# Altium PCB PCB1.PcbDoc
Units mm, origin at the board's own origin, x right, y up, seen from the top; angles counter-clockwise.
Board outline 140.84 x 91.44 mm, 2 copper layers (Top Layer, Bottom Layer); 82 components, 83 nets, 301 pads, 21 vias.
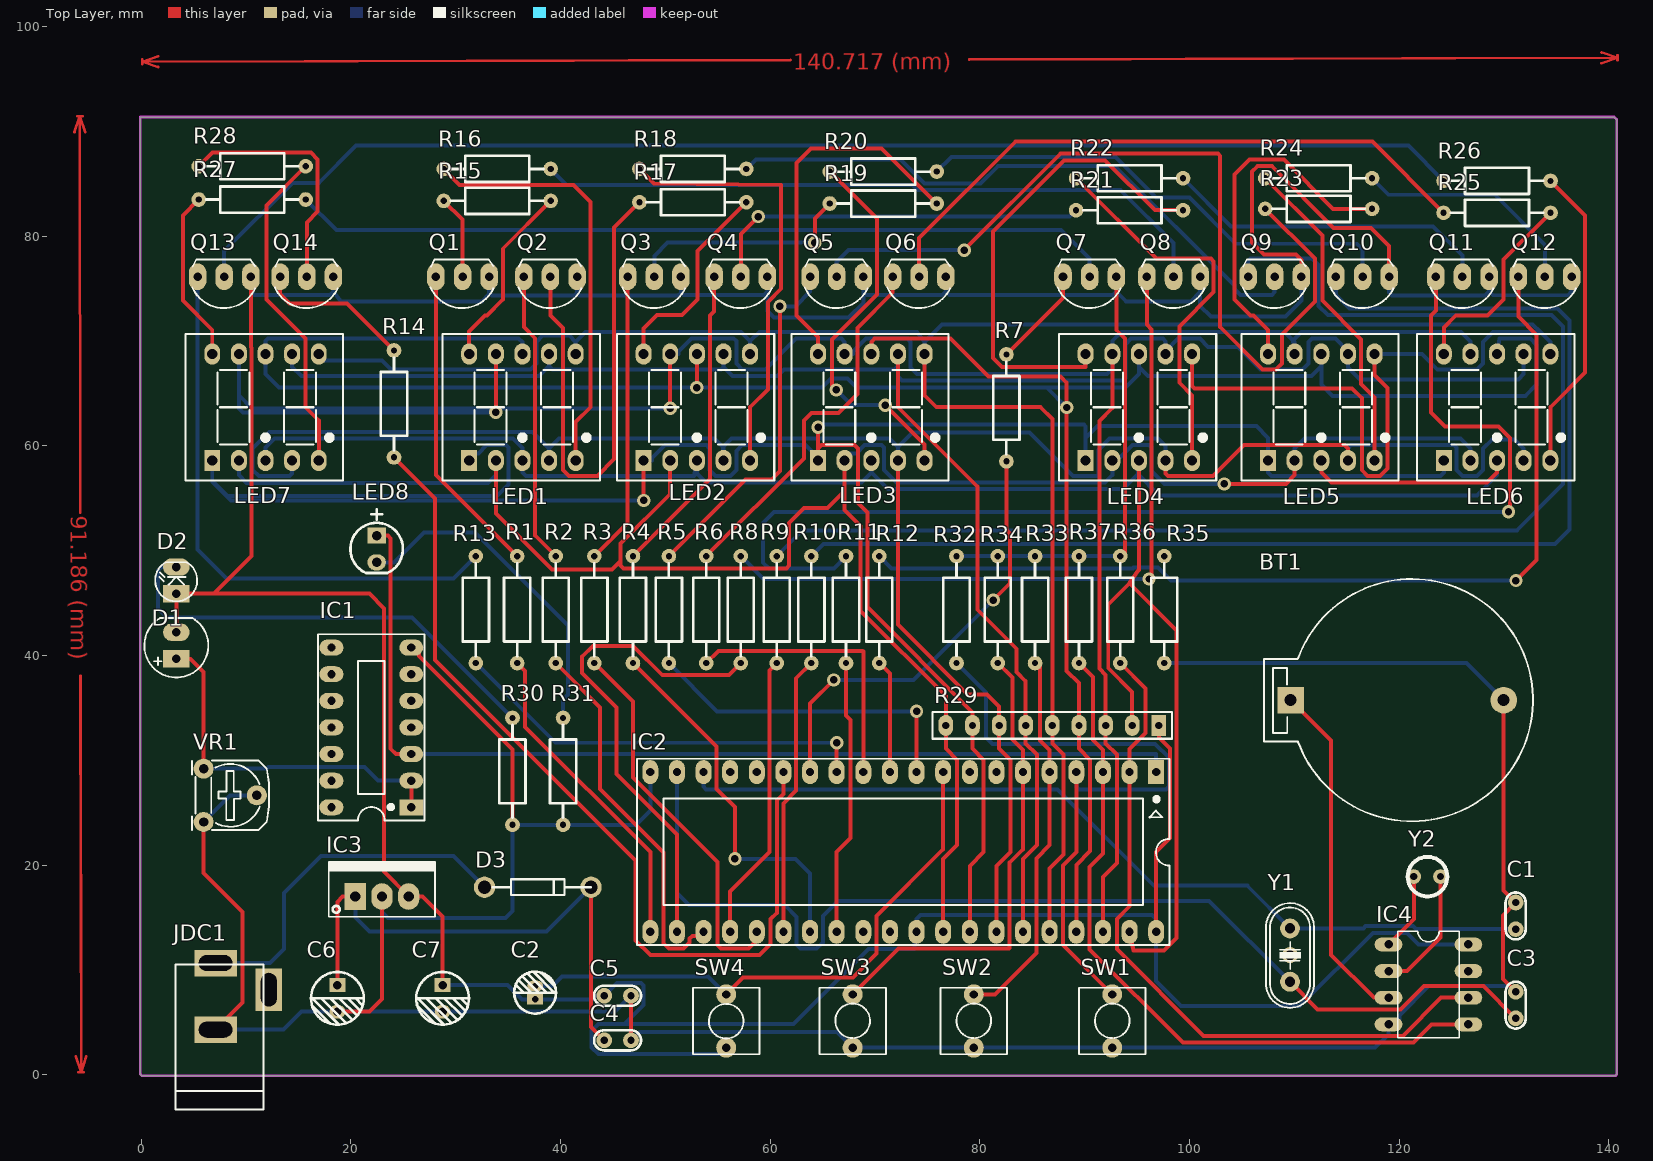
[diagram p0: Top Layer view]
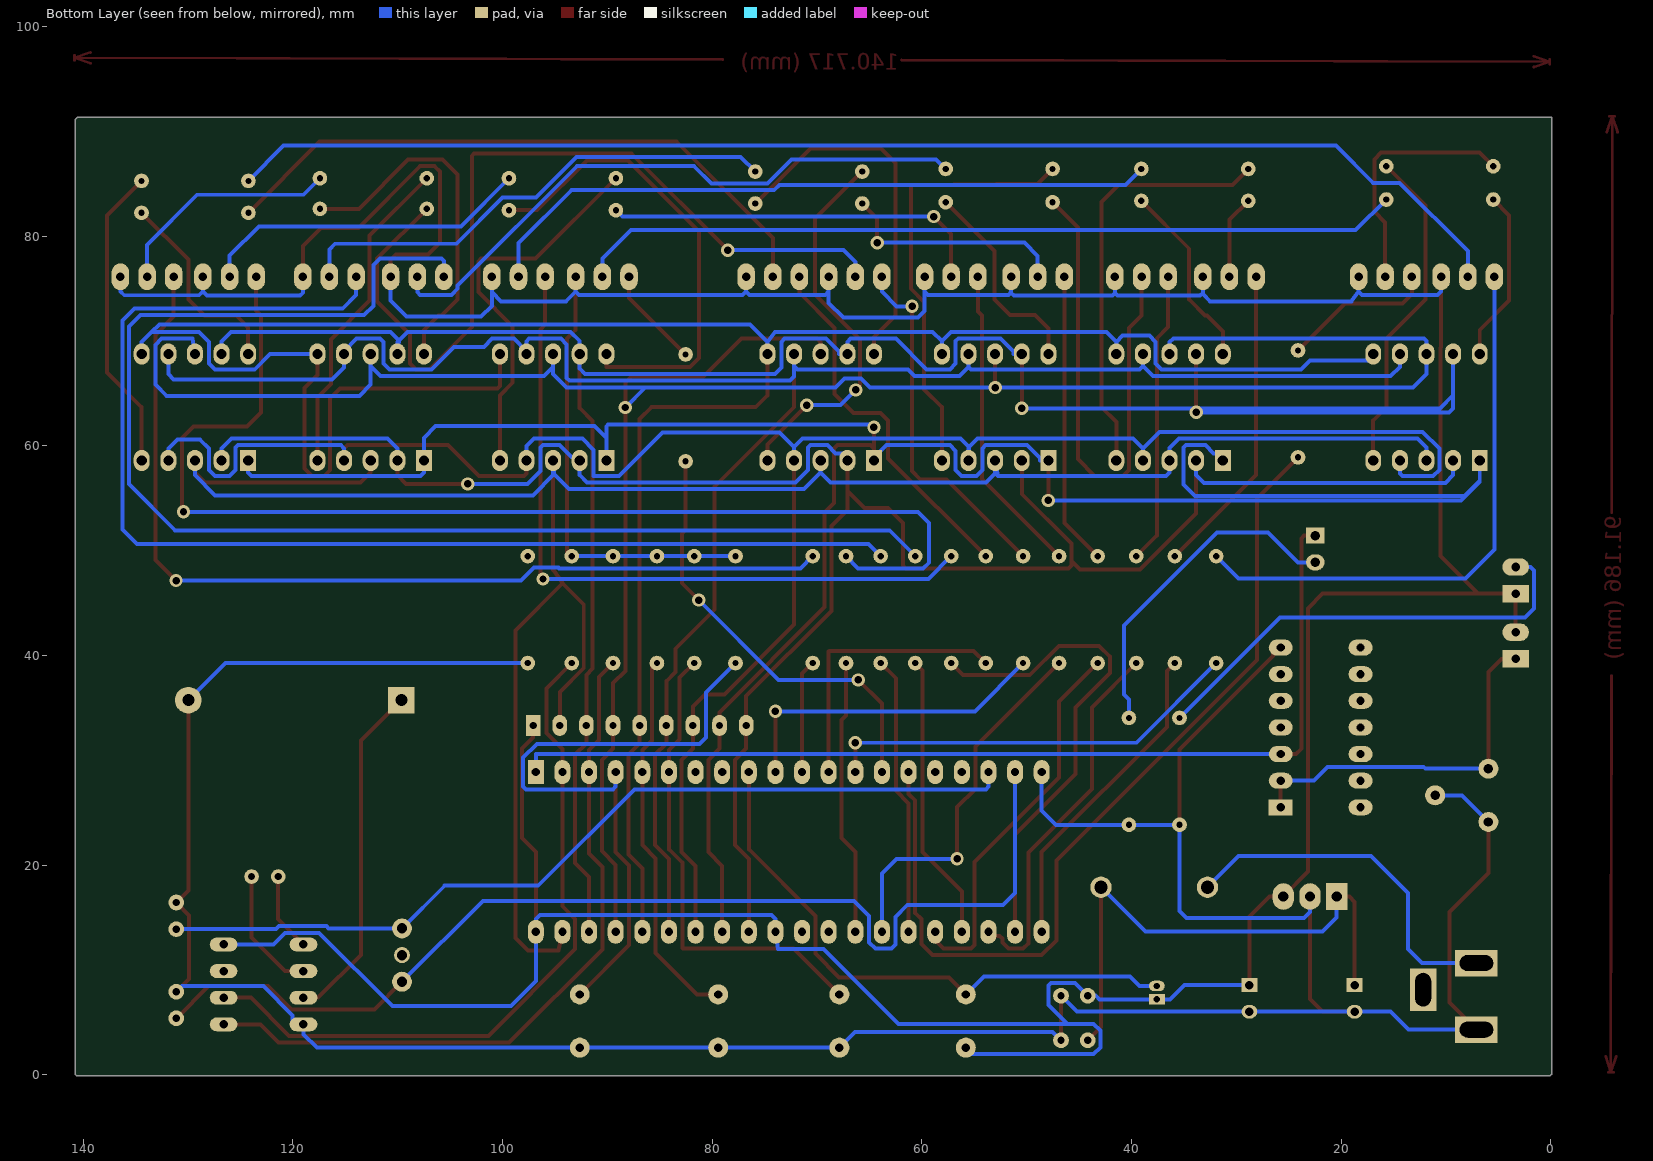
[diagram p1: Bottom Layer view, seen from below]
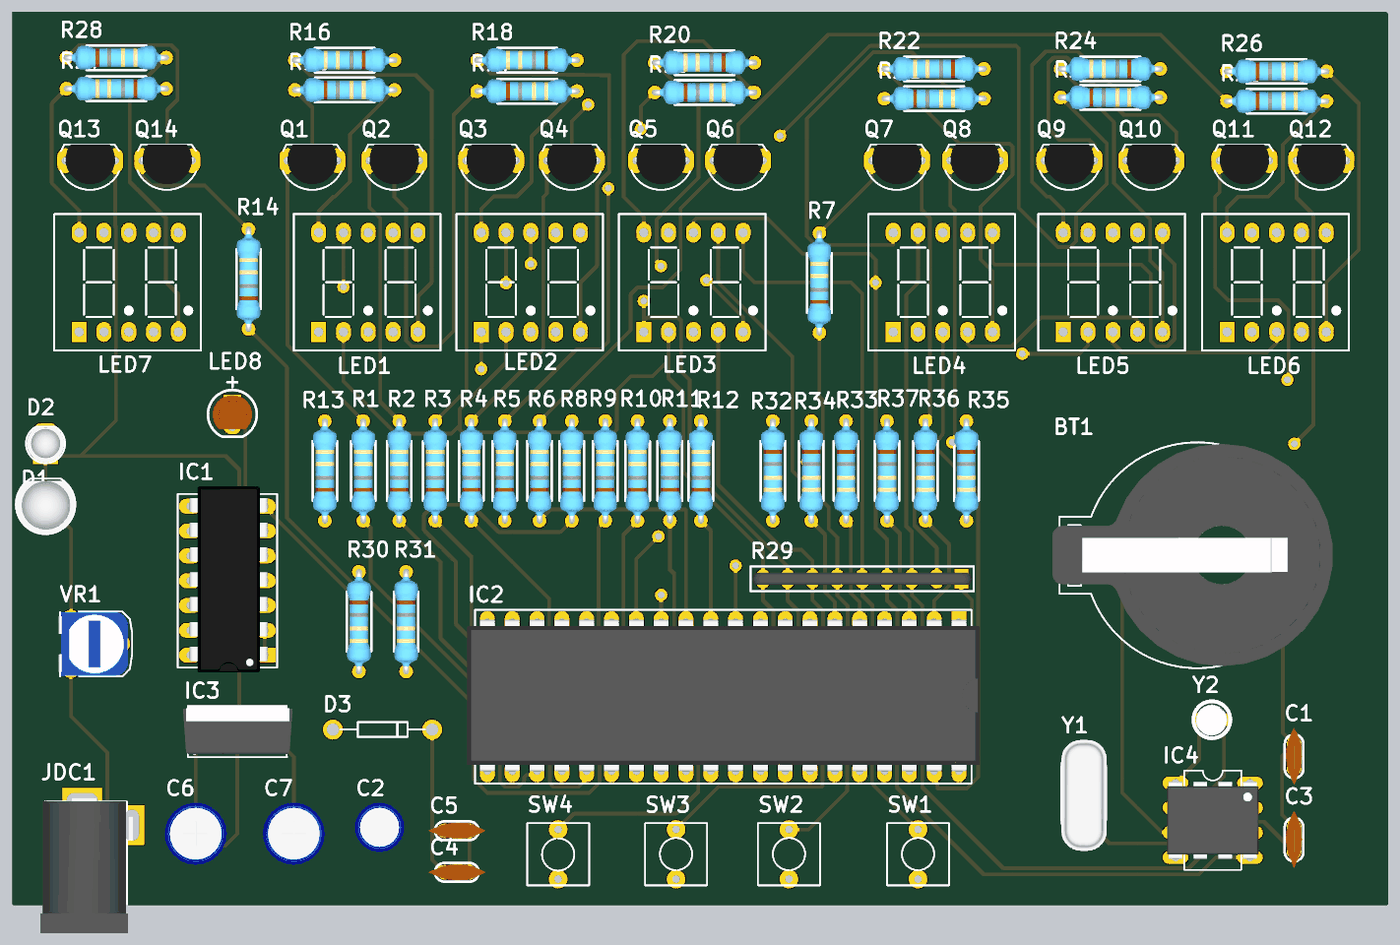
[diagram p2: 3D render of the assembled board from above, using the file's embedded part models]

## Layer stack, top to bottom
Top Solder: solder mask 0.0102, Solder Resist, Dk 3.5
Top Layer: signal copper 0.0356
Dielectric 1: dielectric 0.32, FR-4, Dk 4.8
Bottom Layer: signal copper 0.0356
Bottom Solder: solder mask 0.0102, Solder Resist, Dk 3.5

## Board outline
-0.064,0.064 0.064,-0.064 140.653,-0.064 140.779,0.064 140.779,91.123 140.525,91.376 -0.064,91.376

## Design rules (kind name [scope] priority, off if disabled: settings)
Clearance [All] p1: gap=0.254 ignorepadtopadclearanceinfootprint=FALSE
PolygonConnect [All] p1: connectstyle=Relief reliefconductorwidth=0.254 reliefentries=4 polygonreliefangle="90 Angle" airgapwidth=0.254
RoutingVias [All] p1: holewidth=0.711 width=1.27 viastyle="Through Hole" minholewidth=0.711 minwidth=1.27 maxholewidth=0.711 maxwidth=1.27
SolderMaskExpansion [All] p1: expansion=0.102 istentingtop=FALSE
Width [All] p1: maxlimit=0.508 minlimit=0.254 preferedwidth=0.381
30 further rules are at their usual default settings.

## Components (designator, comment, footprint, x,y, rotation, side; value= is the part's Value field where it differs from the comment)
BT1 "PIN 3V" PIN3V 109.664,35.75 r0 top
C1 "22pF" "tu gom" 131.127,15.176 r90 top
C2 "10uF" "tu hoa 4mm" 37.592,7.851 r90 top
C3 "22pF" "tu gom" 131.127,6.667 r90 top
C4 "104" "tu gom" 45.466,3.302 r0 top
C5 "104" "tu gom" 45.466,7.556 r0 top
C6 "100uF" "tu hoa 5mm" 18.732,7.302 r270 top
C7 "100uF" "tu hoa 5mm" 28.765,7.302 r270 top
D1 "Photo Diode" LED-5-Green 3.365,39.688 r90 top
D2 "Phat" LED-3 3.365,45.91 r90 top value="LED 3 ly Single Colour"
D3 "1N4007" "Diode 1N4007" 37.846,17.907 r0 top
IC1 "MC14093" DIP14/W0.3 25.781,25.527 r90 top
IC2 "AT89C52" DIP40/W0.6 96.837,28.892 r180 top
IC3 "LM7805" QTO-220 20.447,17.018 r0 top
IC4 "DS1307" DIL08 122.809,8.636 r270 top
JDC1 "Jack DC5.5x2.1" DC-IN 9.652,7.493 r90 top
LED1 "Led 7 0.36 3 Số Anot ( Sáng Đỏ)" "LED 7 THANH_0.36x2" 28.765,56.731 r0 top
LED2 "Led 7 0.36 3 Số Anot ( Sáng Đỏ)" "LED 7 THANH_0.36x2" 45.402,56.731 r0 top
LED3 "Led 7 0.36 3 Số Anot ( Sáng Đỏ)" "LED 7 THANH_0.36x2" 62.039,56.731 r0 top
LED4 "Led 7 0.36 3 Số Anot ( Sáng Đỏ)" "LED 7 THANH_0.36x2" 87.566,56.731 r0 top
LED5 "Led 7 0.36 3 Số Anot ( Sáng Đỏ)" "LED 7 THANH_0.36x2" 104.965,56.731 r0 top
LED6 "Led 7 0.36 3 Số Anot ( Sáng Đỏ)" "LED 7 THANH_0.36x2" 121.73,56.731 r0 top
LED7 "Led 7 0.36 3 Số Anot ( Sáng Đỏ)" "LED 7 THANH_0.36x2" 4.255,56.731 r0 top
LED8 "" "LED 3mm Do" 22.479,50.165 r270 top
Q1 "" QTO-92 30.67,76.136 r180 top value=A1015
Q2 "" QTO-92 39.052,76.136 r180 top value=A1015
Q3 "" QTO-92 48.959,76.136 r180 top value=A1015
Q4 "" QTO-92 57.213,76.136 r180 top value=A1015
Q5 "" QTO-92 66.358,76.136 r180 top value=A1015
Q6 "" QTO-92 74.231,76.136 r180 top value=A1015
Q7 "" QTO-92 90.487,76.136 r180 top value=A1015
Q8 "" QTO-92 98.489,76.136 r180 top value=A1015
Q9 "" QTO-92 108.14,76.136 r180 top value=A1015
Q10 "" QTO-92 116.522,76.136 r180 top value=A1015
Q11 "" QTO-92 126.047,76.136 r180 top value=A1015
Q12 "" QTO-92 133.921,76.136 r180 top value=A1015
Q13 "" QTO-92 7.938,76.136 r180 top value=A1015
Q14 "" QTO-92 15.811,76.136 r180 top value=A1015
R1 "10k" "tro vach 1/4w" 35.877,44.386 r270 top
R2 "10k" "tro vach 1/4w" 39.56,44.386 r270 top
R3 "10k" "tro vach 1/4w" 43.243,44.386 r270 top
R4 "10k" "tro vach 1/4w" 46.926,44.386 r270 top
R5 "10k" "tro vach 1/4w" 50.355,44.386 r270 top
R6 "10k" "tro vach 1/4w" 53.911,44.386 r270 top
R7 "10k" "tro vach 1/4w" 82.55,63.627 r270 top
R8 "10k" "tro vach 1/4w" 57.213,44.386 r270 top
R9 "10k" "tro vach 1/4w" 60.642,44.386 r270 top
R10 "10k" "tro vach 1/4w" 63.944,44.386 r270 top
R11 "10k" "tro vach 1/4w" 67.246,44.386 r270 top
R12 "10k" "tro vach 1/4w" 70.421,44.386 r270 top
R13 "10k" "tro vach 1/4w" 31.941,44.386 r270 top
R14 "10k" "tro vach 1/4w" 24.13,64.008 r270 top
R15 "10k" "tro vach 1/4w" 33.972,83.376 r180 top
R16 "10k" "tro vach 1/4w" 33.972,86.423 r0 top
R17 "10k" "tro vach 1/4w" 52.642,83.248 r180 top
R18 "10k" "tro vach 1/4w" 52.642,86.423 r0 top
R19 "10k" "tro vach 1/4w" 70.802,83.121 r180 top
R20 "10k" "tro vach 1/4w" 70.802,86.169 r0 top
R21 "10k" "tro vach 1/4w" 94.297,82.486 r180 top
R22 "10k" "tro vach 1/4w" 94.297,85.534 r0 top
R23 "10k" "tro vach 1/4w" 112.331,82.614 r180 top
R24 "10k" "tro vach 1/4w" 112.331,85.534 r0 top
R25 "10k" "tro vach 1/4w" 129.35,82.233 r180 top
R26 "10k" "tro vach 1/4w" 129.35,85.281 r180 top
R27 "10k" "tro vach 1/4w" 10.604,83.502 r0 top
R28 "10k" "tro vach 1/4w" 10.604,86.677 r180 top
R29 "330" "tro bang a9" 86.931,33.21 r180 top
R30 "220" "tro vach 1/4w" 35.433,28.956 r90 top
R31 "1k" "tro vach 1/4w" 40.259,28.956 r90 top
R32 "10k" "tro vach 1/4w" 77.787,44.386 r90 top
R33 "10k" "tro vach 1/4w" 85.281,44.386 r90 top
R34 "10k" "tro vach 1/4w" 81.724,44.386 r90 top
R35 "4.7k" "tro vach 1/4w" 97.599,44.386 r90 top
R36 "4.7k" "tro vach 1/4w" 93.408,44.386 r90 top
R37 "4.7k" "tro vach 1/4w" 89.471,44.386 r90 top
SW1 "" SW2 92.647,7.683 r270 top
SW2 "" SW2 79.438,7.683 r270 top
SW3 "" SW2 67.882,7.683 r270 top
SW4 "" SW2 55.816,2.603 r90 top
VR1 "100K" "BIEN TRO TAM GIAC" 5.969,29.21 r270 top
Y1 "12Mhz" "THACH ANH CAM" 109.601,11.43 r90 top
Y2 "32768Hz" "Thach Anh 32.768kHz" 121.412,18.923 r270 top

## Footprints (in the part's own frame and the unit in brackets; to place one, negate y for a bottom-side part, rotate by r counter-clockwise, add the part's x,y. Pads: shape width x height; smd on the part's side, far side on the other; paste and mask are expansions set on the pad)
"BIEN TRO TAM GIAC" [mil] "Resistor Variable"
  round 75 hole 35: 1(0,0) 2(100,200) 3(200,0)
  silkscreen extent -31,-44 231,246, body extent -28,-50 228,228, height 279
DC-IN [mm] "Jac DC input"
  rect 2.54x4.064 hole 1.5 slot 3.2 at 90 deg: 1(3.175,2.54) 2(-3.175,2.54)
  rect 4.064x2.54 hole 1.5 slot 3.2 at 0 deg: 3(0.635,-2.54)
  silkscreen extent -10.79,-2.03 3.05,6.35, body extent -10.42,-2.67 3.4,6.84, height 11.02
DIL08 [mil]
  oval 52x104 hole 32: 1(-150,-150) 2(-50,-150) 3(50,-150) 4(150,-150) 5(150,150) 6(50,150) 7(-50,150) 8(-150,150)
  silkscreen extent -200,-115 200,115, body extent -155,-185 155,185, height 180
"Diode 1N4007" [mil] "Diode 2A"
  round 80 hole 50: 1(-200,0) 2(200,0)
  silkscreen extent -170,-30 200,30
DIP14/W0.3 [mil] "14PIN, W 300mil, Pin to pin 100mil"
  rect 60x90 hole 31: 1(0,0)
  oval 60x90 hole 31: 2(100,0) 3(200,0) 4(300,0) 5(400,0) 6(500,0) 7(600,0) 8(600,300) 9(500,300) 10(400,300) 11(300,300) 12(200,300) 13(100,300) 14(0,300)
  silkscreen extent -50,-50 650,350, body extent -70,-12 680,302, height 145
DIP40/W0.6 [mil] "40 PIN, W 600mil, Pin to pin 100mil"
  rect 60x90 hole 31: 1(0,0)
  oval 60x90 hole 31: 2(100,0) 3(200,0) 4(300,0) 5(400,0) 6(500,0) 7(600,0) 8(700,0) 9(800,0) 10(900,0) 11(1000,0) 12(1100,0) 13(1200,0) 14(1300,0) 15(1400,0) 16(1500,0) 17(1600,0) 18(1700,0) 19(1800,0) 20(1900,0) 21(1900,600) 22(1800,600) 23(1700,600) 24(1600,600) 25(1500,600) 26(1400,600) 27(1300,600) 28(1200,600) 29(1100,600) 30(1000,600) 31(900,600) 32(800,600) 33(700,600) 34(600,600) 35(500,600) 36(400,600) 37(300,600) 38(200,600) 39(100,600) 40(0,600)
  silkscreen extent -50,-50 1950,650, body extent -82,-10 1982,600, height 224
"LED 3mm Do" [mil] "Footprintf LED phi 3"
  rect 60x70 hole 35: 1(-50,0)
  oval 60x70 hole 35: 2(50,0)
  silkscreen extent -150,-98 90,98, body extent -77,-78 60,78, height 205
"LED 7 THANH_0.36x2" [mil]
  rect 60x80 hole 38: 1(100,74)
  oval 60x80 hole 38: 2(200,74) 3(300,74) 4(400,74) 5(500,74) 6(500,474) 7(400,474) 8(300,474) 9(200,474) 10(100,474)
  silkscreen extent 0,-1 591,549
LED-3 [mil] "LED 2 PIN, 3ly Only colour"
  rect 65x100 hole 32: 1(0,0)
  oval 65x100 hole 32: 2(100,0)
  silkscreen extent -29,-78 118,79, body extent -25,-75 113,75, height 217
LED-5-Green [mil] "LED 2 PIN, 5 ly , Only colour,pin to pin 100mil"
  rect 65x100 hole 32: 1(0,0)
  oval 65x100 hole 32: 2(100,0)
  silkscreen extent -70,-120 154,120, body extent -69,-120 145,117, height 339
PIN3V [mil] "Socket PIN 3V"
  rect 100x100 hole 45: 1(0,0)
  round 100 hole 45: 2(800,0)
  silkscreen extent -100,-455 910,455, body extent -128,-447 1002,449, height 278
QTO-92 [mil] "TO-92"
  oval 66x100 hole 32: 1(-100,0) 2(0,0) 3(100,0)
  silkscreen extent -117,-65 120,118, body extent -109,-66 109,95, height 245
QTO-220 [mil] "TO-220 - 1-2-3"
  rect 80x100 hole 39: 1(0,0)
  oval 80x100 hole 39: 2(100,0) 3(200,0)
  silkscreen extent -100,-76 300,130, body extent -119,-64 322,121, height 755
SW2 [mil] "SW button 2pin, 250x 250 mil"
  round 75 hole 31: 1(0,0) 2(200,0)
  silkscreen extent -25,-125 225,125
"Thach Anh 32.768kHz" [mm]
  round 1.4 hole 0.7: 1(0,0) 2(0,2.54)
  silkscreen extent -1.88,-0.58 1.89,3.19, body extent -1.55,-0.46 1.65,3, height 8.27
"THACH ANH CAM" [mm] "Footpin for Crystal 2 pin"
  round 1.524 hole 1: 0(0,0)
  round 1.905 hole 1: 1(-2.54,0) 2(2.54,0)
  silkscreen extent -5.03,-2.29 4.96,2.29, body extent -5.93,-2.36 5.42,2.29, height 3.5
"tro bang a9" [mm]
  rect 1.4x2 hole 0.7: 1(-10.16,-0.127)
  oval 1.4x2 hole 0.7: 2(-7.62,-0.127) 3(-5.08,-0.127) 4(-2.54,-0.127) 5(0,-0.127) 6(2.54,-0.127) 7(5.08,-0.127) 8(7.62,-0.127) 9(10.16,-0.127)
  silkscreen extent -11.43,-1.4 11.43,1.14, body extent -11.25,-0.76 11.25,0.49, height 5.57
"tro vach 1/4w" [mm]
  round 1.4 hole 0.6: 1(-5.1,0) 2(5.1,0)
  silkscreen extent -4.39,-1.25 4.42,1.25, body extent -5.38,-1.2 5.38,1.2, height 2.41
"tu gom" [mm] "Tu gom mini"
  round 1.5 hole 0.7: 1(-1.27,0) 2(1.27,0)
  silkscreen extent -2.25,-0.97 2.22,0.97, body extent -2.92,-0.85 2.92,0.85, height 6.12
"tu hoa 4mm" [mm]
  rect 1x1.5 hole 0.6: 1(-0.635,0)
  oval 1x1.5 hole 0.6: 2(0.635,0)
  silkscreen extent -2,-2 2.01,2.01, body extent -2.47,-2.47 2.58,2.58, height 14.81
"tu hoa 5mm" [mm]
  rect 1.3x1.5 hole 0.8: 1(-1.27,0)
  oval 1.3x1.5 hole 0.8: 2(1.27,0)
  silkscreen extent -2.51,-2.51 2.51,2.51, body extent -3.12,-3.18 3.23,3.18, height 14.55

## Part data
BT1: "Battery 3VDC"
C1 C3: library part "Tu gom 22pF 50V", "Cắm", Chung_Loai=Cắm, Don_Vi=Con, Ma_Hang=MH004771, So_Chan=2, Ten_linh_Kien="Tụ gốm 22P 50V"
C2: library part "Tu Hoa 10uF 16V 4x7", "Cắm", Chung_Loai=Cắm, Don_Vi=Con, Ma_Hang=MH006855, So_Chan=2, Ten_linh_Kien="Tụ Hóa 10uF 16V"
C4 C5: library part "Tu gom 104 50V", "Cắm", Chung_Loai=Cắm, Don_Vi=Con, Ma_Hang=MH004761, So_Chan=2, Ten_linh_Kien="Tụ gốm 104 100nF 50V"
C6 C7: library part "Tu Hoa 100uF 16V 5x7", "Cắm", Chung_Loai=Cắm, Don_Vi=Con, Ma_Hang=MH001347, So_Chan=2, Ten_linh_Kien="Tụ Hóa 100uF 16V 5x7MM"
D1: "Photosensitive Diode"
D2: library part LED, "LED phat hong ngoai"
D3: library part D1A, "Diode 1A"
IC1: "Quad 2-Input NAND Schmitt Trigger"
IC2: "Cắm", Chung_Loai=Cắm, Don_Vi=Con, Ma_Hang=MH002200, Ten_linh_Kien="AT89C52-24PC DIP40"
IC3: library part LM78xx, "On ap +, from + 5 to + 24VDC"
IC4: "Real Time Clock (RTC) IC Clock/Calendar 56B IÂ²C, 2-Wire Serial 8-SOIC (0.154, 3.90mm Width)", Package="DIP-8 Maxim Integrated", Check_prices=https://www.snapeda.com/parts/DS1307/Analog+Devices/view-part/?ref=eda, MF="Analog Devices", MP=DS1307, SnapEDA_Link=https://www.snapeda.com/parts/DS1307/Analog+Devices/view-part/?ref=snap
JDC1: library part Jac_DC, "Cắm", Chung_Loai=Cắm, Don_Vi=Con, Ma_Hang=MH000923, Ten_linh_Kien="Jack DC5.5x2.1MM DC5501"
LED1 LED2 LED3 LED4 LED5 LED6 LED7: library part "LED 7 2 SO 0.36_A", "Cắm", Chung_Loai=Cắm, Don_Vi=Con, Ma_Hang=MH001046, Ten_linh_Kien="Led 7 0.36 3 Số Anot ( Sáng Đỏ)"
LED8: library part "LED 3mm Do", "Cắm", Chung_Loai=Cắm, Don_Vi=Con, Ma_Hang=MH004931, Ten_linh_Kien="LED 3MM Sáng Đỏ ( SS)"
Q1 Q2 Q3 Q4 Q5 Q6 Q7 Q8 Q9 Q10 Q11 Q12 Q13 Q14: library part A1015, "PNP 600mW, ECB"
R1 R2 R3 R4 R5 R6 R7 R8 R9 R10 R11 R12 R13 R14 R15 R16 R17 R18 R19 R20 R21 R22 R23 R24 R25 R26 R27 R28 R30 R32 R33 R34: library part "Tro Vach 1/4W 1% 10k", "Cắm", Chung_Loai=Cắm, Don_Vi=Con, Ma_Hang=MH006349, So_Chan=2, Ten_linh_Kien="Trở Vạch 1/4w 1% 10k"
R29: library part "Tro Bang A9 330R", "Cắm", Chung_Loai=Cắm, Don_Vi=Con, Ma_Hang=MH001436, So_Chan=9, Ten_linh_Kien="Trở Băng A09-331 330R 1/8w 5%"
R31: library part "Tro Vach 1/4W 5% 1k", "Cắm", Chung_Loai=Cắm, Don_Vi=Con, Ma_Hang=MH007390, So_Chan=2, Ten_linh_Kien="Trở Vạch 1/4w 5% 1k"
R35 R36 R37: library part "Tro Vach 1/4W 1% 4.7k", "Cắm", Chung_Loai=Cắm, Don_Vi=Con, Ma_Hang=MH006350, So_Chan=2, Ten_linh_Kien="Trở Vạch 1/4w 1% 4.7k"
SW1 SW2 SW3 SW4: library part "Nut Nhan 2 Chan ( Dip )", "Cắm", Chung_Loai=Cắm, Don_Vi=Con, Ma_Hang=MH001959, Ten_linh_Kien="Nút Nhấn 2 Chân 6x6x5MM DIP"
VR1: library part "Bien tro tam giac 1K", "Cắm", Chung_Loai=Cắm, Don_Vi=Con, Ma_Hang=MH003709, Ten_linh_Kien="Biến Trở Tam Giác 102-1K RM065"
Y1 Y2: library part "Thach Anh 8Mhz DIP", "Cắm", Chung_Loai=Cắm, Don_Vi=Con

## Via types
v1: diameter 1.27, hole 0.711, Top Layer to Bottom Layer, 21 vias

## Nets (pads, with @x,y where several pads share a name; then routed paths per layer and width w, separated by ;. In a path a pad name is that pad's centre, name@x,y a point inside that pad or via, vN(x,y) a via of type N, cw(c..) or ccw(c..) an arc to the next point about the centre after c; other vN are vias at no path point)
0.0: IC2.39 LED1.3 LED2.3 LED3.3 LED4.3 LED5.3 LED6.3 LED7.3 R29.2 | length 222.9
  Top Layer w0.381: IC2.39 94.678,11.874 97.599,11.874 98.793,13.068 98.793,42.38 94.272,46.901 ; R29.2 94.551,36.525 92.264,38.812 92.264,44.893 94.272,46.901 ; LED4.3 95.186,48.184 94.272,46.901 ; LED5.3 112.585,57.468 113.538,56.515 128.397,56.515 129.35,57.468 LED6.3
  Bottom Layer w0.381: LED7.3 11.874,59.83 12.751,60.706 35.496,60.706 36.386,59.817 LED1.3 36.386,57.468 36.716,57.137 52.768,57.137 ; LED3.3 69.659,57.468 ; LED6.3 129.35,57.213 127.43,55.294 97.106,55.294 95.098,57.302 ; 52.768,57.137 LED2.3 53.023,57.391 ; 52.768,57.137 53.023,57.391 ; 53.023,57.391 53.899,56.515 68.707,56.515 69.659,57.468 ; 69.659,57.468 71.247,55.88 93.675,55.88 95.098,57.302 ; 95.098,57.302 95.186,57.391 LED4.3 95.098,57.302
0.1: IC2.38 LED1.9 LED2.9 LED3.9 LED4.9 LED5.9 LED6.9 LED7.9 R29.3 | length 232.8
  Top Layer w0.381: v1(33.846,63.208) LED1.9 ; v1(50.482,63.589) LED2.9 ; IC2.38 91.757,18.885 93.078,20.206 93.078,30.569 92.011,31.636 R29.3 92.011,38.163 91.427,38.748 91.427,62.395 92.647,63.614 LED4.9
  Bottom Layer w0.381: LED7.9 9.335,64.834 ; v1(33.846,63.208) 9.716,63.208 9.335,63.589 9.335,64.834 ; v1(50.482,63.589) 10.579,63.589 9.335,64.834 ; LED2.9 51.27,68.77 51.27,68.999 52.502,70.231 56.54,70.231 56.782,69.99 56.782,67.869 57.34,67.31 59.576,67.31 62.497,70.231 66.802,70.231 67.12,69.913 LED3.9 67.907,68.77 67.907,68.999 69.139,70.231 73.101,70.231 73.419,69.913 73.419,67.475 74.028,66.865 92.138,66.865 92.647,67.373 LED4.9 92.647,69.99 93.523,70.866 109.093,70.866 109.893,70.066 ; LED6.9 126.809,69.964 125.908,70.866 110.693,70.866 109.893,70.066 ; 109.893,70.066 110.045,69.913 LED5.9 109.893,70.066
0.2: IC2.37 LED1.8 LED2.8 LED3.8 LED4.8 LED5.8 LED6.8 LED7.8 R29.4 | length 249
  Top Layer w0.381: v1(53.023,65.57) LED2.8 ; LED3.8 69.659,69.913 69.99,70.244 77.203,70.244 80.835,66.611 87.719,66.611 88.303,66.027 v1(88.303,63.665) 88.303,38.544 89.471,37.376 R29.4 89.471,31.128 90.538,30.061 90.538,21.35 89.218,20.029 IC2.37
  Bottom Layer w0.381: LED1.8 36.386,69.913 36.03,70.269 12.128,70.269 11.874,70.015 LED7.8 11.874,66.865 13.17,65.57 v1(53.023,65.57) 64.96,65.57 65.811,66.421 67.4,66.421 68.25,65.57 86.398,65.57 ; v1(88.303,63.665) 86.398,65.57 ; LED4.8 95.186,67.551 ; LED5.8 112.585,67.627 ; LED6.8 129.591,70.231 132.524,70.231 133.109,69.647 133.109,65.849 132.042,64.783 113.652,64.783 112.585,65.849 112.585,67.627 ; 86.398,65.57 93.916,65.57 95.186,66.84 95.186,67.551 ; 95.186,67.551 96.063,66.675 111.633,66.675 112.585,67.627
0.3: IC2.36 LED1.6 LED2.6 LED3.6 LED4.6 LED5.6 LED6.6 LED7.6 R29.5 | length 255.8
  Top Layer w0.381: LED3.6 74.739,64.834 75.882,63.691 85.788,63.691 86.931,62.547 R29.5 86.931,31.636 87.998,30.569 87.998,21.018 86.677,19.698 IC2.36 ; LED4.6 100.266,65.722 100.495,65.494 115.506,65.494 116.446,64.554 116.446,57.696 116.992,57.15 118.186,57.15 118.885,57.848 118.885,65.545 117.665,66.764 LED5.6
  Bottom Layer w0.381: LED7.6 16.954,68.161 22.974,68.161 23.825,67.31 37.135,67.31 37.706,67.882 37.706,69.913 38.316,70.523 40.856,70.523 41.465,69.913 ; LED1.6 41.465,69.913 ; LED2.6 58.102,69.99 ; LED3.6 74.739,69.913 ; LED5.6 122.187,68.77 123.647,67.31 127.444,67.31 128.016,67.882 128.016,69.913 128.969,70.866 133.477,70.866 ; LED6.6 134.429,69.913 133.477,70.866 ; 41.465,69.913 42.418,70.866 57.226,70.866 58.102,69.99 ; 58.102,69.99 58.979,70.866 74.011,70.866 74.739,69.913 ; 74.739,69.913 76.416,71.59 132.753,71.59 133.477,70.866
0.4: IC2.35 LED1.7 LED2.7 LED3.7 LED4.7 LED5.7 LED6.7 LED7.7 R29.6 | length 199.8
  Top Layer w0.381: LED3.7 72.2,63.691 79.769,56.121 79.769,44.386 83.502,40.653 83.502,38.443 84.391,37.554 R29.6 84.391,31.636 85.458,30.569 85.458,21.933 84.138,20.612 IC2.35
  Bottom Layer w0.381: LED7.7 14.414,67.551 15.291,66.675 37.973,66.675 38.925,67.627 ; LED1.7 38.925,67.627 ; LED2.7 55.562,67.551 ; LED3.7 72.2,67.627 ; LED4.7 LED4.7@97.727,69.025 ; LED6.7 131.889,66.865 131.381,66.358 116.268,66.358 115.126,67.501 LED5.7 115.126,69.025 113.919,70.231 111.684,70.231 111.366,69.913 111.366,67.882 110.795,67.31 106.782,67.31 104.635,69.456 101.79,69.456 101.016,70.231 98.933,70.231 LED4.7@97.727,69.025 ; 38.925,67.627 39.256,67.297 55.308,67.297 55.562,67.551 ; 55.562,67.551 56.439,66.675 60.716,66.675 61.338,67.297 71.869,67.297 72.2,67.627 ; 72.2,67.627 72.2,66.637 72.606,66.23 93.637,66.23 93.891,66.484 93.891,69.698 94.424,70.231 97.472,70.231 97.727,69.977 LED4.7@97.727,69.025
0.5: IC2.34 LED1.4 LED2.4 LED3.4 LED4.4 LED5.4 LED6.4 LED7.4 R29.7 | length 205.9
  Top Layer w0.381: LED3.4 72.2,42.97 78.86,36.309 80.709,36.309 81.852,35.166 R29.7 81.852,31.128 82.918,30.061 82.918,21.273 81.597,19.952 IC2.34 ; LED4.4 97.727,57.391 97.98,57.137 102.247,57.137 105.193,60.084 114.795,60.084 115.126,59.753 LED5.4
  Bottom Layer w0.381: LED7.4 14.414,57.391 14.16,57.137 11.239,57.137 10.655,57.721 10.655,59.753 12.243,61.341 37.338,61.341 38.925,59.753 ; LED1.4 38.925,59.753 ; LED3.4 72.2,59.906 ; LED4.4 97.727,60.008 97.028,60.706 92.405,60.706 91.313,59.614 91.313,57.15 88.9,57.15 84.747,61.303 73.596,61.303 72.2,59.906 ; LED5.4 115.126,59.753 115.443,60.071 125.247,60.071 125.489,59.83 125.489,57.721 126.073,57.137 127.444,57.137 128.029,57.721 128.029,59.753 128.892,60.617 131.026,60.617 131.889,59.753 LED6.4 ; 38.925,59.753 39.878,60.706 54.686,60.706 55.505,59.887 ; 55.505,59.887 55.562,59.83 LED2.4 55.505,59.887 ; 55.505,59.887 56.325,60.706 71.399,60.706 72.2,59.906
0.6: IC2.33 LED1.1 LED2.1 LED3.1 LED4.1 LED5.1 LED6.1 LED7.1 R29.8 | length 235.9
  Top Layer w0.381: v1(47.942,54.8) LED2.1 ; LED3.1 64.579,59.753 ; v1(64.579,61.785) 64.579,59.753 ; IC2.33 79.057,19.952 80.378,21.273 80.378,30.061 79.311,31.128 R29.8 79.311,34.582 69.277,44.617 69.277,53.659 68.389,54.546 68.389,59.753 68.059,60.084 64.91,60.084 64.579,59.753
  Bottom Layer w0.381: LED7.1 6.794,56.706 ; LED1.1 31.305,59.296 32.182,59.296 32.956,60.071 34.823,60.071 35.065,59.83 35.065,56.325 33.972,55.232 8.268,55.232 6.794,56.706 ; v1(47.942,54.8) 8.572,54.8 6.794,56.578 6.794,56.706 ; LED2.1 48.73,58.61 48.73,58.839 49.962,60.071 53.924,60.071 54.242,59.753 54.242,57.709 54.8,57.15 56.21,57.15 56.782,57.721 56.782,59.512 57.34,60.071 63.373,60.071 64.579,58.864 LED3.1 ; v1(64.579,61.785) 64.834,62.039 89.929,62.039 90.106,61.862 90.106,60.77 ; LED4.1 90.106,60.77 ; LED6.1 124.269,57.468 123.939,57.137 107.836,57.137 107.505,57.468 LED5.1 107.505,60.77 106.388,61.887 91.224,61.887 90.106,60.77
0.7: IC2.32 LED1.2 LED2.2 LED3.2 LED4.2 LED5.2 LED6.2 LED7.2 R29.9 | length 209.8
  Top Layer w0.381: LED1.2 33.846,53.556 39.205,48.197 44.92,48.197 45.758,49.035 ; LED2.2 50.482,55.435 45.758,50.711 45.758,49.035 ; LED3.2 67.12,55.689 ; IC2.32 76.517,20.612 77.838,21.933 77.838,30.061 76.772,31.128 R29.9 76.772,36.132 68.642,44.261 68.642,52.364 67.12,53.886 67.12,55.689 ; v1(103.314,56.375) 109.207,56.375 110.045,57.213 LED5.2 ; 45.758,49.035 45.758,48.578 46.012,48.323 61.557,48.323 61.811,48.578 61.811,52.642 63.233,54.064 65.494,54.064 67.12,55.689
  Bottom Layer w0.381: LED7.2 9.335,57.213 10.071,56.477 33.109,56.477 33.846,57.213 LED1.2 ; LED3.2 67.12,59.296 68.25,59.296 69.025,60.071 70.637,60.071 70.879,59.83 70.879,57.721 72.085,56.515 91.948,56.515 92.647,57.213 LED4.2 92.647,58.941 93.434,58.941 94.564,60.071 96.164,60.071 96.406,59.83 96.406,57.594 97.625,56.375 v1(103.314,56.375) ; LED5.2 110.045,59.753 110.998,60.706 125.857,60.706 126.809,59.753 LED6.2
b1: IC2.4 R32.1 SW1.1 | length 63.4
  Top Layer w0.381: IC2.4 89.218,21.247 87.947,19.977 87.947,12.383 SW1.1
  Bottom Layer w0.381: R32.1 80.612,36.462 80.612,32.189 81.216,31.585 96.736,31.585 98.057,30.264 98.057,27.495 97.777,27.216 89.497,27.216 89.218,27.495 IC2.4
b2: IC2.5 R33.1 SW2.1 | length 36.7
  Top Layer w0.381: SW2.1 81.471,7.683 85.407,11.62 85.407,20.663 86.677,21.933 IC2.5 86.677,30.975 85.763,31.89 85.763,39.286 R33.1
b3: IC2.6 R34.1 SW3.1 | length 45.5
  Top Layer w0.381: SW3.1 72.25,12.052 82.817,12.052 82.867,12.103 82.867,20.256 84.138,21.526 IC2.6 84.138,30.975 83.121,31.991 83.121,37.889 R34.1
cb: IC1.3 IC2.1 LED8.1 | length 96.4
  Top Layer w0.381: LED8.1 23.558,51.435 23.812,51.181 23.812,31.115 24.32,30.607 IC1.3
  Bottom Layer w0.381: IC1.3 96.799,30.607 IC2.1
GND: BT1.2 C1.2 C3.2 C4.2 C5.2 C6.2 C7.2 IC1.7 IC2.20 IC3.2 IC4.4 JDC1.2 R30.1 R31.1 R35.1 SW1.2 SW2.2 SW3.2 VR1.2 VR1.3 | length 301.9
  Top Layer w0.381: VR1.3 5.969,19.253 9.69,15.532 9.69,6.896 JDC1.2 ; C6.2 21.78,6.032 22.987,7.239 IC3.2 ; IC1.7 26.505,40.767 26.505,39.967 35.433,31.039 R30.1 ; C4.2 C5.2 ; BT1.2 129.984,17.59 C1.2 129.908,15.227 129.908,9.157 C3.2
  Bottom Layer w0.381: VR1.3 8.509,26.67 VR1.2 ; JDC1.2 13.589,4.318 15.303,6.032 C6.2 C7.2 45.212,6.032 C5.2 ; IC3.2 22.987,15.557 23.571,14.973 34.773,14.973 35.433,15.634 R30.1 R31.1 47.224,23.856 48.578,25.209 IC2.20 ; C4.2 47.536,4.102 66.383,4.102 SW3.2 SW2.2 SW1.2 117.729,2.603 118.999,3.873 IC4.4 120.028,4.826 120.028,5.677 122.822,8.471 130.594,8.471 C3.2 ; R35.1 126.449,39.286 BT1.2
l1: IC2.21 R1.2 | length 30.9
  Top Layer w0.381: R1.2 36.639,38.524 36.639,33.21 48.578,21.273 IC2.21
l2: IC2.22 R8.2 | length 47.2
  Top Layer w0.381: IC2.22 51.117,22.924 45.352,28.689 45.352,35.065 42.075,38.341 42.075,39.891 43.116,40.932 46.926,40.932 49.721,38.138 56.065,38.138 R8.2
l3: IC2.23 R2.2 | length 36.1
  Top Layer w0.381: R2.2 43.777,35.07 43.777,27.267 49.847,21.196 49.847,12.56 50.343,12.065 51.752,12.065 52.337,12.649 52.337,13.018 52.591,13.271 53.657,13.271 IC2.23
l4: IC2.24 R9.2 | length 27.5
  Top Layer w0.381: IC2.24 56.197,17.513 59.957,21.273 59.957,38.601 R9.2
l5: IC2.25 R3.2 | length 36.8
  Top Layer w0.381: R3.2 46.926,35.603 46.926,28.359 54.978,20.307 54.978,12.395 55.308,12.065 57.95,12.065 58.737,12.852 IC2.25
l6: IC2.26 R10.2 | length 26.7
  Top Layer w0.381: IC2.26 61.277,25.895 62.497,27.114 62.497,37.839 R10.2
l7: IC2.27 R4.2 | length 36
  Top Layer w0.381: R4.2 54.902,31.311 54.902,27.292 56.655,25.54 v1(56.655,20.612)
  Bottom Layer w0.381: v1(56.655,20.612) 62.42,20.612 63.817,19.215 IC2.27
l8: IC2.28 R11.2 | length 26.4
  Top Layer w0.381: IC2.28 66.358,21.273 67.678,22.593 67.678,33.871 67.246,34.303 R11.2
l9: IC2.10 R5.2 | length 31.3
  Top Layer w0.381: IC2.10 v1(73.977,34.684)
  Bottom Layer w0.381: R5.2 54.958,34.684 v1(73.977,34.684)
l10: IC2.11 R12.2 | length 10.8
  Top Layer w0.381: R12.2 71.438,38.27 IC2.11
l11: IC2.12 R6.2 | length 27
  Top Layer w0.381: R6.2 55.075,40.45 68.821,40.45 68.897,40.373 IC2.12
l12: IC2.13 R13.2 | length 40.4
  Top Layer w0.381: IC2.13 v1(66.358,31.686)
  Bottom Layer w0.381: R13.2 39.54,31.686 v1(66.358,31.686)
l13: IC2.14 R7.2 | length 42.1
  Top Layer w0.381: IC2.14 63.817,35.42 v1(66.078,37.681) ; v1(81.293,45.301) 82.893,46.901 82.893,51.625 82.55,51.968 R7.2
  Bottom Layer w0.381: v1(66.078,37.681) 73.673,37.681 v1(81.293,45.301)
l14: IC2.15 R14.2 | length 86.4
  Top Layer w0.381: R14.2 28.054,54.984 28.054,39.586 47.18,20.46 47.18,12.84 48.59,11.43 58.979,11.43 60.058,12.509 60.058,14.872 60.642,15.456 60.642,26.175 61.277,26.81 IC2.15
NetBT1_1: BT1.1 IC4.3 | length 33.1
  Top Layer w0.381: BT1.1 113.525,31.89 113.525,11.436 117.596,7.366 IC4.3
NetC1_1: C1.1 IC2.18 Y1.2 | length 84.7
  Bottom Layer w0.381: IC2.18 53.657,27.495 53.911,27.241 87.439,27.241 96.634,18.047 105.524,18.047 Y1.2 116.599,13.97 116.815,14.186 121.323,14.186 121.602,13.906 C1.1
NetC2_2: C2.2 IC2.9 SW4.2 | length 55.2
  Top Layer w0.381: SW4.2 57.442,9.309 67.907,9.309 70.168,11.57 70.168,15.176 76.517,21.526 IC2.9
  Bottom Layer w0.381: C2.2 39.23,8.486 40.155,9.411 54.089,9.411 SW4.2
NetC3_1: C3.1 IC2.19 Y1.1 | length 105.1
  Top Layer w0.381: Y1.1 112.23,6.261 120.155,6.261 122.364,8.471 128.054,8.471 C3.1
  Bottom Layer w0.381: IC2.19 51.117,17.361 52.261,16.218 61.404,16.218 62.547,15.075 62.547,12.433 62.928,12.052 64.453,12.052 65.037,12.636 65.037,15.151 66.484,16.599 101.892,16.599 Y1.1
NetC4_1: C4.1 C6.1 D3.2 IC3.1 | length 51.8
  Top Layer w0.381: C6.1 18.732,16.51 19.241,17.018 IC3.1 ; D3.2 42.926,4.572 C4.1
  Bottom Layer w0.381: IC3.1 20.447,15.011 21.78,13.678 38.697,13.678 D3.2
NetD1_1: D1.1 IC1.1 IC1.2 VR1.1 | length 35.3
  Top Layer w0.381: D1.1 4.699,39.688 5.969,38.417 VR1.1 ; IC1.1 IC1.2
  Bottom Layer w0.381: VR1.1 11.976,29.21 12.141,29.375 21.298,29.375 22.606,28.067 IC1.2
NetD2_2: D2.2 R30.2 | length 43.6
  Bottom Layer w0.381: D2.2 1.968,48.45 1.638,48.12 1.638,44.488 2.476,43.65 25.839,43.65 R30.2
NetD3_1: D3.1 JDC1.1 | length 34.2
  Bottom Layer w0.381: JDC1.1 12.294,10.668 13.627,12.002 13.627,17.335 17.158,20.866 29.807,20.866 D3.1
NetIC4_1: IC4.1 Y2.1 | length 7.5
  Top Layer w0.381: IC4.1 121.412,14.859 Y2.1
NetIC4_2: IC4.2 Y2.2 | length 12.1
  Top Layer w0.381: IC4.2 120.764,9.906 123.952,13.094 Y2.2
NetLED1_5: LED1.5 R16.1 | length 40.6
  Top Layer w0.381: R16.1 30.396,84.9 41.237,84.9 42.888,83.248 42.888,63.691 41.465,62.268 LED1.5
NetLED1_10: LED1.10 R15.1 | length 17.9
  Top Layer w0.381: LED1.10 31.305,70.929 32.829,72.453 32.982,72.453 34.506,73.977 34.506,78.809 R15.1
NetLED2_5: LED2.5 R18.1 | length 41.6
  Top Layer w0.381: R18.1 48.913,85.052 61.049,84.874 61.049,74.993 59.804,73.749 59.804,65.392 58.102,63.691 LED2.5
NetLED2_10: LED2.10 R17.1 | length 19.9
  Top Layer w0.381: LED2.10 47.942,71.209 49.212,72.479 51.6,72.479 53.099,73.977 53.099,78.606 R17.1
NetLED3_5: LED3.5 R20.1 | length 36.7
  Top Layer w0.381: R20.1 70.193,81.679 70.193,74.435 65.9,70.142 65.9,65.773 v1(66.332,65.341) ; v1(70.98,63.894) 74.739,60.134 LED3.5
  Bottom Layer w0.381: v1(66.332,65.341) 67.78,63.894 v1(70.98,63.894)
NetLED3_10: LED3.10 R19.1 | length 35.2
  Top Layer w0.381: LED3.10 64.579,70.396 62.522,72.453 62.522,86.982 63.919,88.379 70.645,88.379 R19.1
NetLED4_5: LED4.5 R22.1 | length 37.2
  Top Layer w0.381: R22.1 96.868,77.864 102.044,77.864 102.311,77.597 102.311,74.676 99.047,71.412 99.047,66.027 100.266,64.808 LED4.5
NetLED4_10: LED4.10 R21.1 | length 45.4
  Top Layer w0.381: LED4.10 90.106,67.526 82.131,67.526 81.267,68.389 81.267,80.454 88.062,87.249 91.973,87.249 96.736,82.486 R21.1
NetLED5_5: LED5.5 R24.1 | length 31.2
  Top Layer w0.381: R24.1 112.687,80.079 112.687,73.876 116.395,70.168 116.395,65.9 117.665,64.63 LED5.5
NetLED5_10: LED5.10 R23.1 | length 34.3
  Top Layer w0.381: LED5.10 107.505,71.056 106.108,72.453 105.829,72.453 104.305,73.977 104.305,85.89 105.729,87.314 109.011,87.314 113.712,82.614 R23.1
NetLED6_5: LED6.5 R26.1 | length 29.4
  Top Layer w0.381: LED6.5 134.429,63.691 137.757,67.018 137.757,81.973 R26.1
NetLED6_10: LED6.10 R25.1 | length 19.5
  Top Layer w0.381: LED6.10 124.269,71.31 125.412,72.453 128.46,72.453 129.984,73.977 129.984,77.767 R25.1
NetLED7_5: LED7.5 R28.1 | length 31.7
  Top Layer w0.381: R28.1 11.976,82.949 11.976,73.977 15.684,70.269 15.684,63.691 16.954,62.42 LED7.5
NetLED7_10: LED7.10 R27.1 | length 16.5
  Top Layer w0.381: R27.1 4,81.999 4,73.85 6.794,71.056 LED7.10
NetLED8_2: LED8.2 R31.2 | length 32.1
  Bottom Layer w0.381: LED8.2 24.13,48.895 26.987,51.752 31.864,51.752 40.729,42.888 40.729,36.284 40.259,35.814 R31.2
NetQ1_2: Q1.2 R15.2 | length 8
  Top Layer w0.381: R15.2 30.67,81.577 Q1.2
NetQ1_3: Q1.3 R1.1 | length 29.9
  Top Layer w0.381: Q1.3 28.13,57.234 R1.1
NetQ2_2: Q2.2 R17.2 | length 50.2
  Top Layer w0.381: Q2.2 39.052,72.453 40.246,71.26 40.246,57.721 40.831,57.137 43.523,57.137 45.123,58.737 45.123,80.83 R17.2
NetQ2_3: Q2.3 R2.1 | length 27.9
  Top Layer w0.381: Q2.3 36.512,71.336 37.605,70.244 37.605,51.442 R2.1
NetQ3_2: Q3.2 R19.2 | length 22.1
  Top Layer w0.381: v1(64.275,79.388) 64.275,81.694 R19.2
  Bottom Layer w0.381: Q3.2 48.959,78.118 50.228,79.388 v1(64.275,79.388)
NetQ3_3: Q3.3 R3.1 | length 28
  Top Layer w0.381: R3.1 46.419,52.662 Q3.3
NetQ4_2: Q4.2 R21.2 | length 37
  Top Layer w0.381: Q4.2 57.213,80.2 v1(58.89,81.877)
  Bottom Layer w0.381: v1(58.89,81.877) 88.588,81.877 R21.2
NetQ4_3: Q4.3 R4.1 | length 29.9
  Top Layer w0.381: R4.1 54.292,56.853 54.292,72.428 54.673,72.809 Q4.3
NetQ5_2: Q5.2 R23.2 | length 84.5
  Top Layer w0.381: v1(78.524,78.676) 87.732,87.884 102.718,87.884 102.946,87.655 102.946,71.323 106.972,67.297 108.242,67.297 108.826,67.882 108.826,70.625 111.976,73.774 111.976,77.869 R23.2
  Bottom Layer w0.381: Q5.2 66.358,77.534 67.501,78.676 v1(78.524,78.676)
NetQ5_3: Q5.3 R5.1 | length 34.5
  Top Layer w0.381: R5.1 57.676,56.807 60.165,56.807 60.947,57.589 v1(60.947,73.317)
  Bottom Layer w0.381: v1(60.947,73.317) 62.42,73.317 63.817,74.714 Q5.3
NetQ6_2: Q6.2 R25.2 | length 60.3
  Top Layer w0.381: Q6.2 74.231,79.819 83.439,89.027 117.455,89.027 R25.2
NetQ6_3: Q6.3 R6.1 | length 35.5
  Top Layer w0.381: R6.1 63.233,58.808 63.233,62.446 63.944,63.157 66.53,63.157 68.339,64.965 68.339,71.26 71.691,74.612 Q6.3
NetQ7_2: Q7.2 R27.2 | length 78.8
  Bottom Layer w0.381: R27.2 18.626,80.581 87.77,80.581 90.487,77.864 Q7.2
NetQ7_3: Q7.3 R7.1 | length 9.6
  Top Layer w0.381: R7.1 87.947,74.125 Q7.3
NetQ8_2: Q8.2 R16.2 | length 65.6
  Bottom Layer w0.381: R16.2 40.597,84.9 73.613,84.9 74.123,84.39 93.435,84.39 98.489,79.337 Q8.2
NetQ8_3: Q8.3 R8.1 | length 69
  Top Layer w0.381: Q8.3 95.948,71.564 96.406,71.107 96.406,47.561 v1(96.152,47.307)
  Bottom Layer w0.381: R8.1 59.393,47.307 v1(96.152,47.307)
NetQ9_2: Q9.2 R18.2 | length 59.3
  Bottom Layer w0.381: R18.2 58.656,87.338 72.445,87.338 74.758,85.025 80.097,85.025 81.751,86.679 92.924,86.679 104.305,75.298 104.305,74.993 104.889,74.409 107.886,74.409 108.14,74.663 Q9.2
NetQ9_3: Q9.3 R9.1 | length 129.5
  Bottom Layer w0.381: R9.1 63.112,51.956 131.233,51.956 135.649,56.371 135.649,71.387 134.556,72.479 113.221,72.479 112.331,73.368 112.331,77.254 111.697,77.889 105.855,77.889 105.6,77.635 Q9.3
NetQ10_2: Q10.2 R20.2 | length 47.5
  Bottom Layer w0.381: R20.2 77.3,87.566 92.951,87.566 96.837,83.68 100.013,83.68 104.407,79.286 115.989,79.286 116.522,78.753 Q10.2
NetQ10_3: Q10.3 R10.1 | length 118.4
  Bottom Layer w0.381: R10.1 65.093,50.635 134.887,50.635 136.284,52.032 136.284,71.945 135.115,73.114 115.252,73.114 113.983,74.384 Q10.3
NetQ11_2: Q11.2 R22.2 | length 31.7
  Bottom Layer w0.381: R22.2 103.995,80.937 123.253,80.937 126.047,78.143 Q11.2
NetQ11_3: Q11.3 R11.1 | length 112.7
  Top Layer w0.381: Q11.3 123.507,72.911 123.05,72.453 123.05,63.208 124.396,61.862 129.476,61.862 130.569,60.77 130.569,53.835 v1(130.442,53.708)
  Bottom Layer w0.381: R11.1 66.083,48.323 59.88,48.323 59.347,48.857 59.347,52.667 60.389,53.708 v1(130.442,53.708)
NetQ12_2: Q12.2 R24.2 | length 22.2
  Bottom Layer w0.381: R24.2 119.006,83.96 129.146,83.96 133.921,79.184 Q12.2
NetQ12_3: Q12.3 R12.1 | length 92.3
  Top Layer w0.381: v1(131.153,47.155) 133.109,49.111 133.109,70.599 131.381,72.326 Q12.3
  Bottom Layer w0.381: R12.1 71.585,48.323 94.602,48.323 94.678,48.4 96.99,48.4 98.234,47.155 v1(131.153,47.155)
NetQ13_2: Q13.2 R26.2 | length 124.3
  Bottom Layer w0.381: Q13.2 7.938,78.6 14.44,85.103 16.954,85.103 20.498,88.646 120.884,88.646 R26.2
NetQ13_3: Q13.3 R13.1 | length 54.6
  Bottom Layer w0.381: Q13.3 5.397,50.102 8.141,47.358 29.812,47.358 R13.1
NetQ14_2: Q14.2 R28.2 | length 23.8
  Top Layer w0.381: R28.2 6.8,87.973 16.192,87.973 16.853,87.312 16.853,82.359 15.811,81.318 Q14.2
NetQ14_3: Q14.3 R14.1 | length 14.7
  Top Layer w0.381: Q14.3 13.271,74.486 14.16,73.596 19.642,73.596 R14.1
scl: IC2.2 IC4.6 R36.1 | length 67.9
  Top Layer w0.381: R36.1 95.822,36.873 95.822,32.626 94.297,31.102 IC2.2 94.297,16.091 93.078,14.872 93.078,12.002 101.359,3.721 120.358,3.721 124.003,7.366 IC4.6
sda: IC2.3 IC4.5 R37.1 | length 69.3
  Top Layer w0.381: R37.1 90.792,37.966 90.792,31.941 91.757,30.975 IC2.3 91.757,21.12 90.487,19.85 90.487,11.976 99.377,3.086 121.374,3.086 123.114,4.826 IC4.5
VCC: C2.1 C5.1 C7.1 D1.2 D2.1 IC2.31 IC2.40 IC3.3 IC4.8 Q1.1 Q2.1 Q3.1 Q4.1 Q5.1 Q6.1 Q7.1 Q8.1 Q9.1 Q10.1 Q11.1 Q12.1 Q13.1 Q14.1 R29.1 R32.2 R33.2 R34.2 R36.2 R37.2 SW4.1 | length 480.5
  Top Layer w0.381: D1.2 D2.1 6.947,45.91 ; Q13.1 10.477,69.431 10.554,69.355 10.554,49.517 6.947,45.91 ; C7.1 28.765,15.113 26.86,17.018 IC3.3 25.527,17.043 23.177,19.393 23.177,44.514 21.78,45.91 6.947,45.91 ; Q7.1 93.027,71.082 93.866,70.244 93.866,49.487 R36.2 ; IC2.40 96.837,21.273 98.158,22.593 98.158,31.128 97.091,32.194 R29.1 ; Q9.1 110.68,77.737 110.172,78.245 107.124,78.245 105.981,79.388 105.981,86.169 106.491,86.679 107.866,86.679 113.735,80.81 117.31,80.81 119.062,79.057 Q10.1
  Bottom Layer w0.381: Q13.1 10.477,74.739 10.808,74.409 18.021,74.409 18.351,74.739 ; Q14.1 18.351,74.739 ; C7.1 34.978,8.572 36.335,7.216 C2.1 43.085,7.216 43.425,7.556 C5.1 45.415,8.776 47.688,8.776 47.942,8.522 47.942,6.693 46.114,4.864 ; Q1.1 33.21,74.612 ; Q2.1 41.593,74.612 ; Q3.1 51.498,74.663 ; SW4.1 55.816,1.994 43.624,1.994 42.989,2.629 42.989,4.229 43.624,4.864 46.114,4.864 ; Q4.1 59.753,74.739 ; Q5.1 68.897,74.739 ; Q6.1 76.772,74.739 ; R32.2 R34.2 R33.2 R37.2 R36.2 ; Q7.1 93.027,74.739 ; Q8.1 101.028,74.663 ; Q9.1 110.68,73.85 109.156,72.326 102.044,72.326 101.028,73.343 101.028,74.663 ; Q10.1 119.062,74.612 119.316,74.358 128.207,74.358 128.588,74.739 ; IC4.8 121.869,12.446 120.764,13.551 117.513,13.551 110.528,6.566 99.225,6.566 96.837,8.954 IC2.40 96.837,14.872 96.456,15.253 74.358,15.253 73.977,14.872 IC2.31 73.724,12.002 69.38,12.002 62.243,4.864 46.114,4.864 ; Q11.1 128.588,74.739 ; Q12.1 136.462,74.739 136.095,74.373 128.954,74.373 128.588,74.739 ; 18.351,74.739 19.037,73.8 32.525,73.8 33.21,74.486 33.21,74.612 ; 33.21,74.612 33.465,74.358 41.338,74.358 41.593,74.612 ; 41.593,74.612 41.846,74.358 51.244,74.358 51.498,74.612 51.498,74.663 ; 51.498,74.663 51.752,74.409 59.423,74.409 59.753,74.739 ; 59.753,74.739 59.753,72.873 60.389,72.238 67.501,72.238 68.897,73.635 68.897,74.739 ; 68.897,74.739 69.228,74.409 76.441,74.409 76.772,74.739 ; 76.772,74.739 77.102,74.409 92.697,74.409 93.027,74.739 ; 93.027,74.739 93.98,73.787 100.152,73.787 101.028,74.663
pads on no net: IC1.4 IC1.5 IC1.6 IC1.8 IC1.9 IC1.10 IC1.11 IC1.12 IC1.13 IC1.14 IC2.7 IC2.8 IC2.16 IC2.17 IC2.29 IC2.30 IC4.7 JDC1.3 R35.2 Y1.0
copper on no net: | length 214.2
  Top Layer w0.254: -6.348,89.915 -5.842,91.44 ; -6.225,1.777 -5.715,0.254 ; -6.096,91.44 -5.588,91.44 ; -5.969,0.254 -5.461,0.254 ; -5.789,53.617 -5.842,91.44 ; -5.768,38.077 -5.715,0.254 ; -5.332,89.917 -5.842,91.44 ; -5.209,1.779 -5.715,0.254 ; 0.126,96.901 0.128,96.393 ; 1.65,97.159 0.127,96.647 ; 1.652,96.143 0.127,96.647 ; 61.953,96.814 0.127,96.647 ; 79.017,96.861 140.843,97.028 ; 139.318,97.532 140.843,97.028 ; 139.32,96.516 140.843,97.028 ; 140.842,97.282 140.844,96.774

## Keep-outs
Top Layer:
  lines w0.254: -0.064,0.064 0.064,-0.064 140.653,-0.064 140.779,0.064 140.779,91.123 140.525,91.376 -0.064,91.376 -0.064,48.831 -0.064,0.064

## Other copper
Top Layer:
  text "140.717 (mm)" at 62.21,95.901 h1.52 r0.16
  text "91.186 (mm)" at -6.703,53.362 h1.52 r270.08